# Altium PCB BrakeLightNM.PcbDoc
Units mm, origin at the board's own origin, x right, y up, seen from the top; angles counter-clockwise.
Board outline 120 x 27 mm, 2 copper layers (Top Layer, Bottom Layer), stack 1.569 mm thick; 18 components, 18 nets, 40 pads, 2 vias.
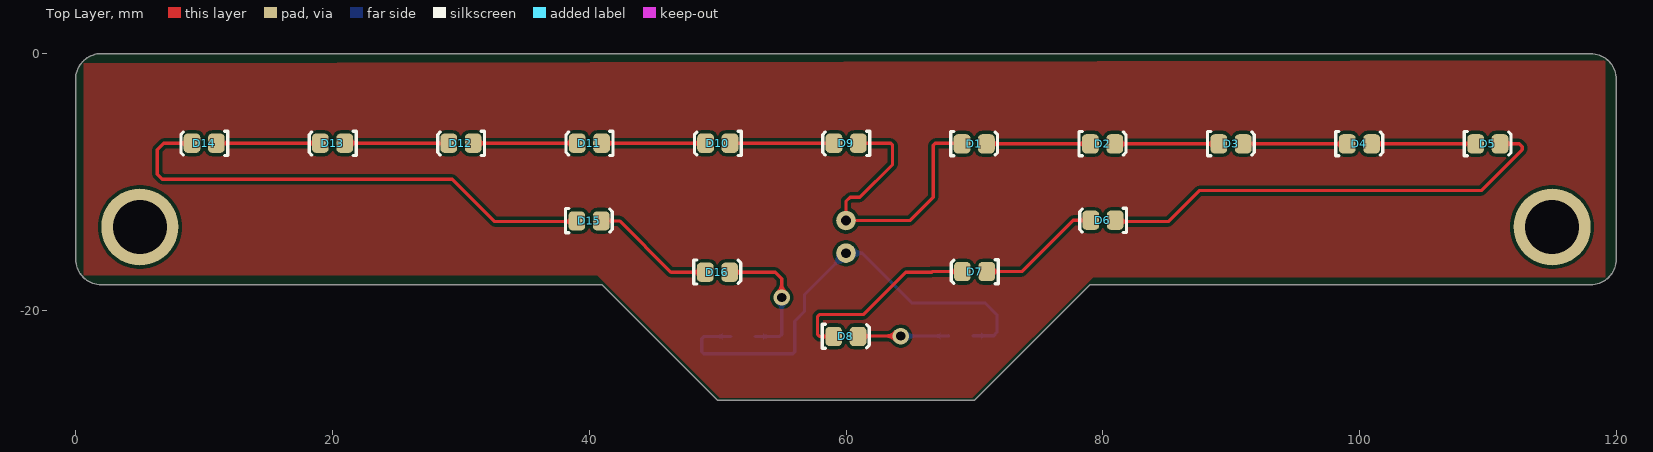
[diagram p0: Top Layer view]
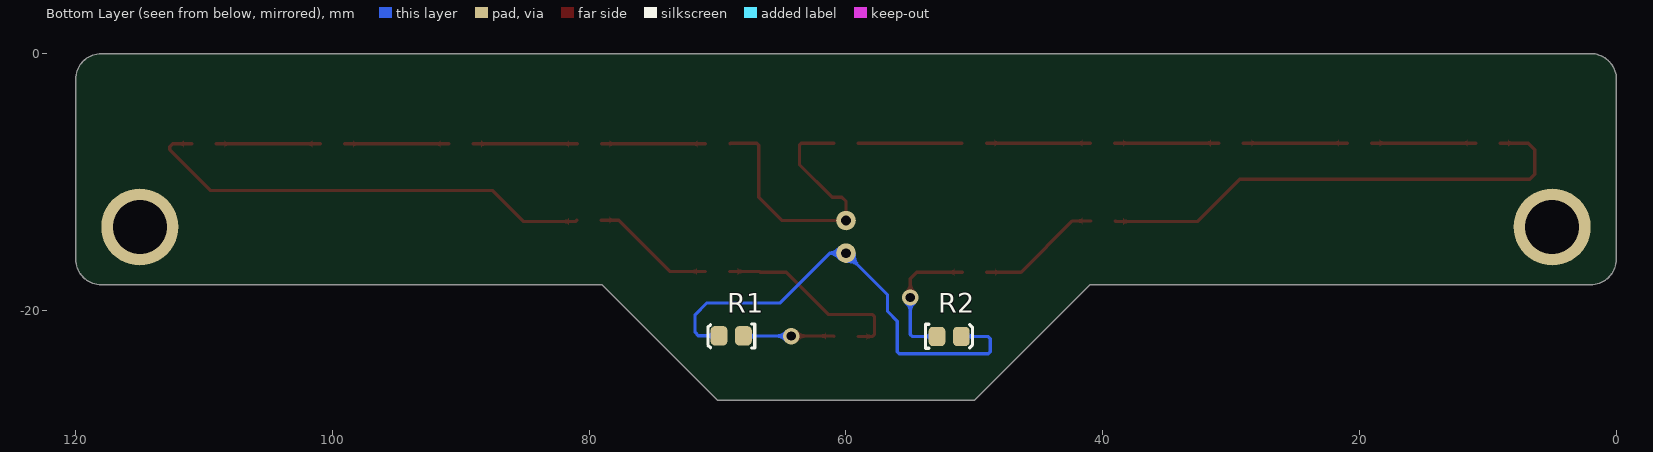
[diagram p1: Bottom Layer view, seen from below]
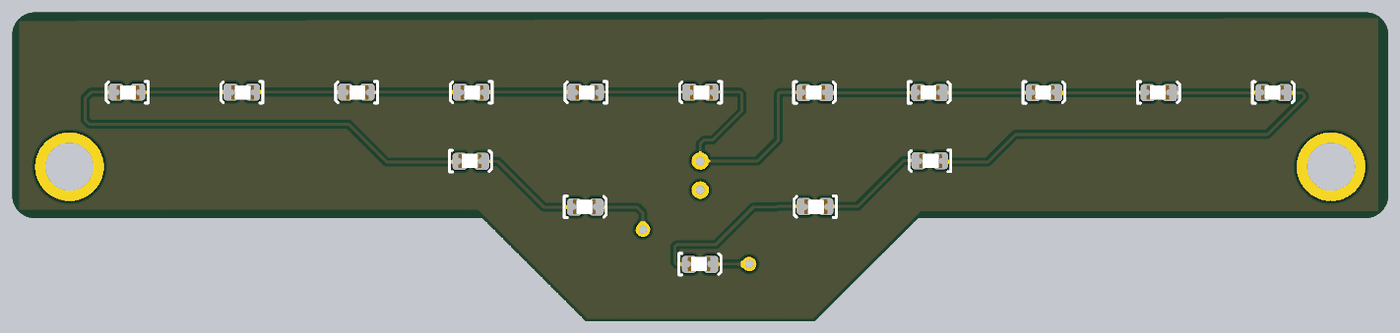
[diagram p2: 3D render of the assembled board from above, using the file's embedded part models]

## Layer stack, top to bottom
Top Solder: solder mask 0.0254, SM-001, Dk 4
Top Layer: signal copper 0.035
Dielectric 1: core 1.4986, Core-043, Dk 4.3
Bottom Layer: signal copper 0.035
Bottom Solder: solder mask 0.0254, SM-001, Dk 4

## Board outline
2,-18 cw(c2,-16) 0,-16 0,-2 cw(c2,-2) 2,0 118,0 cw(c118,-2) 120,-2 120,-16 cw(c118,-16) 118,-18 79,-18 70,-27 50,-27 41,-18

## Design rules (kind name [scope] priority, off if disabled: settings)
Clearance [All] p1: gap=0.254 ignorepadtopadclearanceinfootprint=FALSE except(0: Arc-Hole Track-Hole SMDPad-Hole THPad-Hole Via-Hole Fill-Hole Poly-Hole Region-Hole Text-Hole)
PolygonConnect [All] p1: connectstyle=Relief reliefconductorwidth=0.254 reliefentries=4 polygonreliefangle="90 Angle" airgapwidth=0.254
RoutingVias [All] p1: holewidth=0.711 width=1.27 viastyle="Through Hole" minholewidth=0.711 minwidth=1.27 maxholewidth=0.711 maxwidth=1.27
SolderMaskExpansion [All] p1: expansion=0.102 istentingtop=FALSE
Width [All] p1: maxlimit=0.254 minlimit=0.254 preferedwidth=0.254
30 further rules are at their usual default settings.

## Components (designator, comment, footprint, x,y, rotation, side; value= is the part's Value field where it differs from the comment)
D1 "Red" "0805 LED" 70,-7 r0 top
D2 "Red" "0805 LED" 80,-7 r0 top
D3 "Red" "0805 LED" 90,-7 r0 top
D4 "Red" "0805 LED" 100,-7 r0 top
D5 "Red" "0805 LED" 110,-7 r0 top
D6 "Red" "0805 LED" 80,-13 r180 top
D7 "Red" "0805 LED" 70,-17 r180 top
D8 "Red" "0805 LED" 60,-22 r0 top
D9 "Red" "0805 LED" 60,-7 r180 top
D10 "Red" "0805 LED" 50,-7 r180 top
D11 "Red" "0805 LED" 40,-7 r180 top
D12 "Red" "0805 LED" 30,-7 r180 top
D13 "Red" "0805 LED" 20,-7 r180 top
D14 "Red" "0805 LED" 10,-7 r180 top
D15 "Red" "0805 LED" 40,-13 r0 top
D16 "Red" "0805 LED" 50,-17 r0 top
R1 "470R" 0805 68.952,-22 r0 bottom
R2 "470R" 0805 51.952,-22 r180 bottom

## Footprints (in the part's own frame and the unit in brackets; to place one, negate y for a bottom-side part, rotate by r counter-clockwise, add the part's x,y. Pads: shape width x height; smd on the part's side, far side on the other; paste and mask are expansions set on the pad)
0805 [mm]
  rrect50% 1.3x1.5 smd: 1(-0.962,-0.026) 2(0.938,-0.026)
  silkscreen extent -1.85,-0.95 1.8,0.93, body extent -1,-0.65 1,0.66, height 0.73
"0805 LED" [mm]
  rrect50% 1.3x1.5 smd: A(-0.962,-0.026) K(0.938,-0.026)
  silkscreen extent -1.85,-0.95 1.8,0.93, body extent -1.1,-0.62 0.9,0.62, height 1

## Part data
D1 D2 D3 D4 D5 D6 D7 D8 D9 D10 D11 D12 D13 D14 D15 D16: library part SML-210LTT86, "Red LED Indication - Discrete 1.75V 0805 (2012 Metric)", Digikey Part Number=511-1286-1-ND, Manufacturer="ROHM Semiconductor", Colour=Red, Digikey Link=https://www.digikey.com/product-detail/en/rohm-semiconductor/SML-210LTT86/511-1286-1-ND/637099, Part Number=SML-210LTT86
R1 R2: library part RC0805FR07470RL, Digikey Part Number=311-470CRCT-ND, Manufacturer=YAGEO, Rated Voltage=0.125W, Tolerance=0.01, Material=FR-07, Part Number=RC0805FR07470RL

## Free pads (board coordinates)
  round 6 hole 4.2 unplated: 1(5,-13.5) 2(115,-13.5)
  round 1.524 hole 0.762: Gnd(60,-15.54) Vcc(60,-13)

## Via types
v1: diameter 1.27, hole 0.711, Top Layer to Bottom Layer, 2 vias

## Nets (pads, with @x,y where several pads share a name; then routed paths per layer and width w, separated by ;. In a path a pad name is that pad's centre, name@x,y a point inside that pad or via, vN(x,y) a via of type N, cw(c..) or ccw(c..) an arc to the next point about the centre after c; other vN are vias at no path point)
NetD1_A: D1.A D9.A pad.Vcc | length 24.5
  Top Layer w0.254: D9.A@60.974,-6.986 D9.A 63.478,-6.974 63.627,-7.123 63.627,-8.636 61.087,-11.176 60.325,-11.176 60,-11.501 pad.Vcc 64.978,-13 66.802,-11.176 66.802,-7.135 66.951,-6.986 68.998,-6.986 D1.A
NetD1_K: D1.K D2.A | length 8.1
  Top Layer w0.254: D1.K D2.A
NetD2_K: D2.K D3.A | length 8.1
  Top Layer w0.254: D2.K D3.A
NetD3_K: D3.K D4.A | length 8.1
  Top Layer w0.254: D3.K D4.A
NetD4_K: D4.K D5.A | length 8.1
  Top Layer w0.254: D4.K D5.A
NetD5_K: D5.K D6.A | length 36.1
  Top Layer w0.254: D6.A 81.07,-13.082 85.09,-13.082 87.503,-10.669 109.474,-10.669 112.671,-7.472 112.671,-7.262 112.435,-7.026 D5.K
NetD6_K: D6.K D7.A | length 9.8
  Top Layer w0.254: D7.A 73.705,-16.974 77.705,-12.974 D6.K
NetD7_K: D7.K D8.A | length 15.4
  Top Layer w0.254: D8.A 57.934,-22.026 57.785,-21.877 57.785,-20.47 57.934,-20.321 61.341,-20.321 64.643,-17.019 66.675,-17.019 66.72,-16.974 D7.K
NetD8_K: D8.K R1.1 | length 7.1
  Top Layer w0.254: D8.K 60.964,-22 v1(64.262,-22)
  Bottom Layer w0.254: v1(64.262,-22) 67.963,-22 R1.1
NetD9_K: D9.K D10.A | length 8.1
  Top Layer w0.254: D10.A D9.K
NetD10_K: D10.K D11.A | length 8.1
  Top Layer w0.254: D11.A D10.K
NetD11_K: D11.K D12.A | length 8.1
  Top Layer w0.254: D12.A D11.K
NetD12_K: D12.K D13.A | length 8.1
  Top Layer w0.254: D13.A D12.K
NetD13_K: D13.K D14.A | length 8.1
  Top Layer w0.254: D14.A D13.K
NetD14_K: D14.K D15.A | length 39.1
  Top Layer w0.254: D14.K 6.87,-6.974 6.35,-7.494 6.35,-9.399 6.731,-9.78 29.337,-9.78 32.639,-13.082 38.982,-13.082 D15.A
NetD15_K: D15.K D16.A | length 9.8
  Top Layer w0.254: D15.K 42.362,-13.026 46.362,-17.026 D16.A
NetD16_K: D16.K R2.1 | length 10.8
  Top Layer w0.254: D16.K 54.491,-17.026 54.991,-17.526 54.991,-18.991 v1(55,-19)
  Bottom Layer w0.254: R2.1 54.842,-22.026 54.991,-21.877 54.991,-19.009 v1(55,-19)
"NetHeader ?_2": pad.Gnd R1.2 R2.2 | length 37.1
  Bottom Layer w0.254: R2.2 48.95,-22.026 48.768,-22.208 48.768,-23.219 48.917,-23.368 55.858,-23.368 56.007,-23.219 56.007,-20.828 56.769,-20.066 56.769,-18.771 pad.Gnd 61.26,-15.54 65.151,-19.431 70.866,-19.431 71.755,-20.32 71.755,-21.717 71.498,-21.974 R1.2

## Polygon pours and split planes (outlines as drawn)
no net on Top Layer "NONET_L01_P000" (solid, pour order 0): 0.635,-0.762 0.635,-17.272 40.64,-17.272 50.165,-26.797 69.85,-26.797 79.248,-17.399 119.126,-17.399 119.126,-0.508

## Silkscreen, mask and mechanical layers (free items; w line width, h text height)
Bottom Overlay:
Mechanical 1:
  the board outline again, w0.254
Drill Drawing:
  lines w0.254: 4.709,11.917 5.133,11.917 5.556,11.493 5.979,11.917 6.403,11.917 5.979,12.34 6.403,12.763 5.979,12.763 5.556,13.187 5.133,12.763 4.709,12.763 5.133,12.34 4.709,11.917 ; 4.709,16.997 6.403,16.997 5.556,15.303 4.709,16.997 ; 4.709,19.113 6.403,19.113 6.403,20.807 4.709,20.807 4.709,19.113
  lines w0.381: 3.19,10.351 269.157,10.351 ; 3.19,21.78 269.157,21.78 ; 17.183,6.54 17.183,25.59 ; 29.372,6.54 29.372,25.59 ; 58.573,6.54 58.573,25.59 ; 71.422,6.54 71.422,25.59 ; 90.061,6.54 90.061,25.59 ; 128.15,6.54 128.15,25.59 ; 143.132,6.54 143.132,25.59 ; 162.075,6.54 162.075,25.59 ; 178.581,6.54 178.581,25.59 ; 200.266,6.54 200.266,25.59 ; 234.14,6.54 234.14,25.59 ; 3.19,6.54 269.157,6.54 269.157,25.59 3.19,25.59 3.19,6.54
  text "Symbol" at 5.476,22.924 h1.83
  text "Count" at 18.326,22.924 h1.83
  text "Hole Size" at 30.515,22.924 h1.83
  text "Plated" at 59.716,22.924 h1.83
  text "Hole Type" at 72.565,22.924 h1.83
  text "Drill Layer Pair" at 91.204,22.924 h1.83
  text "Via/Pad" at 129.293,22.924 h1.83
  text "Pad Shape" at 144.275,22.924 h1.83
  text "Template" at 163.218,22.924 h1.83
  text "Description" at 179.724,22.924 h1.83
  text "Hole Tolerance (+)" at 201.409,22.924 h1.83
  text "Hole Tolerance (-)" at 235.283,22.924 h1.83
  text "2" at 18.326,19.113 h1.52
  text "0.711mm (28.00mil)" at 30.515,19.113 h1.52
  text "PTH" at 59.716,19.113 h1.52
  text "Round" at 72.565,19.113 h1.52
  text "Top Layer - Bottom Layer" at 91.204,19.113 h1.52
  text "Via" at 129.293,19.113 h1.52
  text "Rounded" at 144.275,19.113 h1.52
  text "v127h71" at 163.218,19.113 h1.52
  text "2" at 18.326,15.303 h1.52
  text "0.762mm (30.00mil)" at 30.515,15.303 h1.52
  text "PTH" at 59.716,15.303 h1.52
  text "Round" at 72.565,15.303 h1.52
  text "Top Layer - Bottom Layer" at 91.204,15.303 h1.52
  text "Pad" at 129.293,15.303 h1.52
  text "Rounded" at 144.275,15.303 h1.52
  text "c152h76" at 163.218,15.303 h1.52
  text "2" at 18.326,11.493 h1.52
  text "4.200mm (165.35mil)" at 30.515,11.493 h1.52
  text "NPTH" at 59.716,11.493 h1.52
  text "Round" at 72.565,11.493 h1.52
  text "Top Layer - Bottom Layer" at 91.204,11.493 h1.52
  text "Pad" at 129.293,11.493 h1.52
  text "Rounded" at 144.275,11.493 h1.52
  text "c600hn420" at 163.218,11.493 h1.52
  text "6 Total" at 18.326,7.683 h1.52
  text "FABRICATION NOTES" at 137.414,-5.715 h3
  text "1. QUANTITY: 5" at 137.356,-10.893 h3
  text "2. SIZE:" at 137.356,-15.99 h3
  text "3. LAYERS: 2" at 137.356,-21.086 h3
  text "4. SIGNAL LAYERS: 1,2" at 137.356,-25.183 h3
  text "a) WEIGHT: 1oz" at 142.356,-31.279 h3
  text "5. PLANES: 0" at 137.356,-36.375 h3
  text "a) WEIGHT: 0oz" at 142.356,-41.472 h3
  text "6. SOLDER MASKS: Black" at 137.356,-46.568 h3
  text "7. SILKSCREEN: White" at 137.356,-51.665 h3
  text "8. SURFACE FINISH: HASL (With Lead)" at 137.356,-56.761 h3
  text "9 FINISHED COPPER: 2oz Cu" at 137.356,-61.857 h3
  text "10. TOTAL THICKNESS: 1.6mm" at 137.356,-66.954 h3